# EAGLE board untitled (EAGLE 9.6.2)
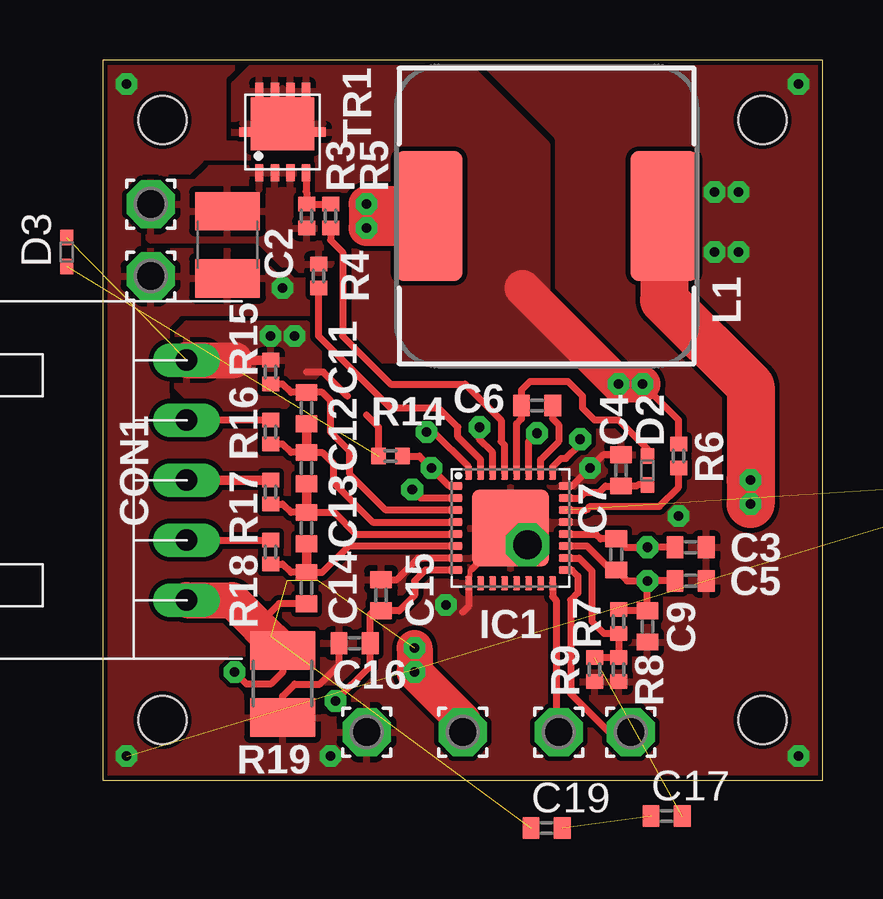
[diagram p0: board, top side]
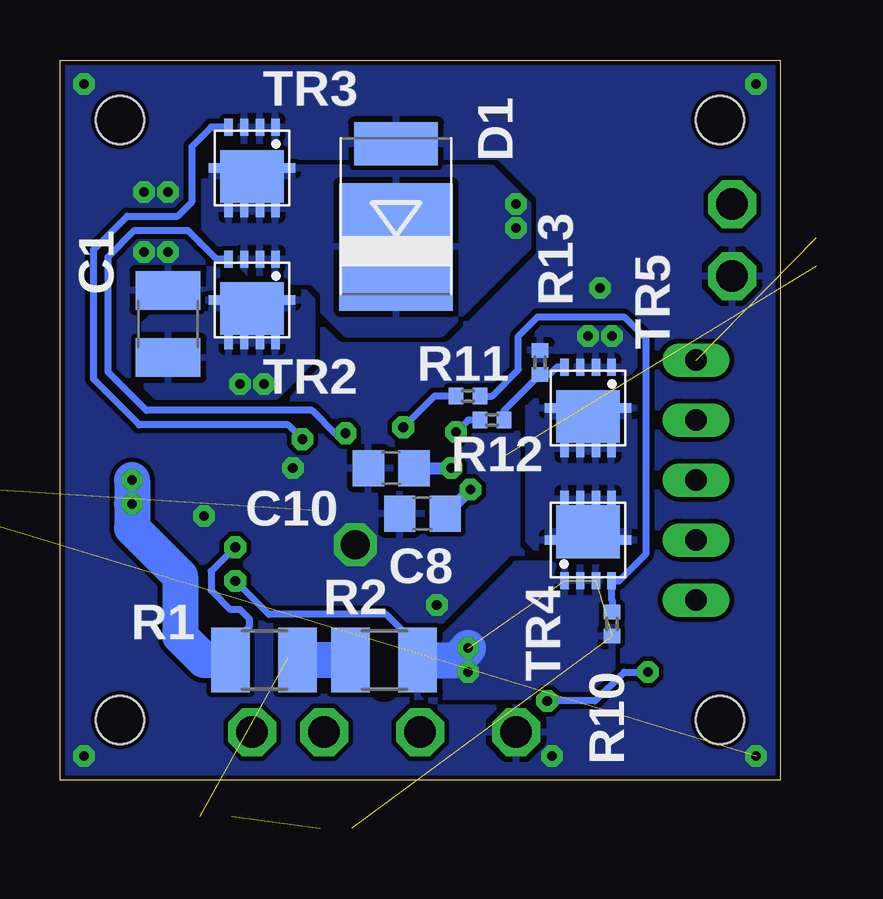
[diagram p1: board, bottom side, seen from below]

Size 30 x 30 mm. Coordinates in mm from the lower left corner, seen from the top.
Outline: 0,0 30,0 30,30 0,30 0,0
Copper layers (1*16): Top 0.035mm / dielectric 1.5mm / Bottom 0.035mm
Design rules "SeeedStudio_2layer_DRU_no_angle_20140221_IMD555": minimum track width 0.2mm, minimum drill 0.3mm, track to track 0.2mm, track to pad 0.2mm, pad to pad 0.2mm, via to via 0.2mm, smd to smd 0mil, copper to edge 0.2mm, drill to drill 10mil, minimum pad ring 0.25mm, minimum via ring 0.2mm, stop-mask expansion 0.03mm, vias tented up to drill 5mm, thermal gap 10mil
Holes 2 mm at 2.5,2.5 27.5,2.5 2.5,27.5 27.5,27.5
tRestrict: 1 lines
bRestrict: 1 lines

## Footprints (pad centres in the part's own frame; a part is rotated, then mirrored left to right if it is on the bottom)
C1210 = smd 1.6 x 2.7: 1 -1.4,0; 2 1.4,0
C0402 = smd 0.7 x 0.9: 1 -0.65,0; 2 0.65,0
C0805 = smd 1.3 x 1.5: 1 -0.95,0; 2 0.95,0
XH-5_S = drill 0.9 long: 1 5,0; 2 2.5,0; 3 0,0; 4 -2.5,0; 5 -5,0
TO-277A = smd 1.78 x 3.48: A 3.01,0 | smd 5.3 x 4.72: C -1.29,0
VMN2 = smd 0.65 x 0.55: A 0.6,0; C -0.6,0
QFN32 = smd 0.6 x 0.3: 1 -2.3,1.75; 2 -2.3,1.25; 3 -2.3,0.75; 4 -2.3,0.25; 5 -2.3,-0.25; 6 -2.3,-0.75; 7 -2.3,-1.25; 8 -2.3,-1.75; 17 2.3,-1.75; 18 2.3,-1.25; 19 2.3,-0.75; 20 2.3,-0.25; 21 2.3,0.25; 22 2.3,0.75; 23 2.3,1.25; 24 2.3,1.75 | smd 0.3 x 0.6: 9 -1.75,-2.3; 10 -1.25,-2.3; 11 -0.75,-2.3; 12 -0.25,-2.3; 13 0.25,-2.3; 14 0.75,-2.3; 15 1.25,-2.3; 16 1.75,-2.3; 25 1.75,2.3; 26 1.25,2.3; 27 0.75,2.3; 28 0.25,2.3; 29 -0.25,2.3; 30 -0.75,2.3; 31 -1.25,2.3; 32 -1.75,2.3 | smd 3.2 x 3.2: EXP 0,0
SCRH125 = smd 5.4 x 2.8: 1 0,4.9; 2 0,-4.9
2.0/1.3 = drill 1.3 pad 2 octagon: 1 0,0
R1210 = smd 1.6 x 2.7: 1 -1.4,0; 2 1.4,0
R0402 = smd 0.6 x 0.7: 1 -0.5,0; 2 0.5,0
TSON_ADVANCE = smd 0.35 x 0.7: 1 -0.975,-1.7; 2 -0.325,-1.7; 3 0.325,-1.7; 4 0.975,-1.7; 5 0.975,1.7; 6 0.325,1.7; 7 -0.325,1.7; 8 -0.975,1.7 | smd 2.65 x 2.2: DRAIN1 0,0.35 | smd 3.6 x 0.4: DRAIN2 0,0

## Placement (x,y rotation side)
C1  22u  [C1210]  25.5,19 90 bottom
C2  22u  [C1210]  5.2,22.3 270 top
C3  0.1u  [C0402]  24.5,9.7 0 top
C4  4.7u  [C0402]  21.6,12.9 90 top
C5  0.1u  [C0402]  24.5,8.3 0 top
C6  0.1u  [C0402]  18.1,15.6 180 top
C7  0.1u  [C0402]  21.4,9.4 270 top
C8  4.7u  [C0805]  14.9,11.1 180 bottom
C9  xxxxxx  [C0402]  22.7,6.4 270 top
C10  4.7u  [C0805]  16.2,13 180 bottom
C11  0.1u  [C0402]  8.5,15.5 270 top
C12  0.1u  [C0402]  8.5,13 270 top
C13  0.1u  [C0402]  8.5,10.5 270 top
C14  0.1u  [C0402]  8.5,8 270 top
C15  47p  [C0402]  11.6,7.7 90 top
C16  0.1u  [C0402]  10.5,5.7 180 top
C17  47p  [C0402]  23.5,-1.5 0 top
C18  1u  [C0402]  33.5,11.5 270 top  (outside the outline)
C19  47p  [C0402]  18.5,-2 0 top
CON1  5P_(ICSP)XH_S  [XH-5_S]  3.5,12.5 90 top
D1  [TO-277A]  16,23.5 90 bottom
D2  [VMN2]  22.7,12.9 270 top
D3  [VMN2]  -1.5,22 90 top
IC1  BQ40Z60  [QFN32]  17,10.5 0 top
L1  22u  [SCRH125]  18.5,23.5 90 top
PAD1  WIREPAD2.0/1.2  [2.0/1.3]  2,24 0 top
PAD2  WIREPAD2.0/1.2  [2.0/1.3]  2,21 0 top
PAD3  WIREPAD2.0/1.2  [2.0/1.3]  19,2 0 top
PAD4  WIREPAD2.0/1.2  [2.0/1.3]  22,2 0 top
PAD5  WIREPAD2.0/1.2  [2.0/1.3]  15,2 0 top
PAD6  WIREPAD2.0/1.2  [2.0/1.3]  11,2 0 top
R1  5m  [R1210]  21.5,5 0 bottom
R2  5m  [R1210]  16.5,5 0 bottom
R3  4.7M  [R0402]  8.5,23.5 270 top
R4  10k  [R0402]  9,21 90 top
R5  10k  [R0402]  9.5,23.5 90 top
R6  10  [R0402]  24,13.5 90 top
R7  100k  [R0402]  21.5,6.6 90 top
R8  10k  [R0402]  21.5,4.6 90 top
R9  33k  [R0402]  20.5,4.6 90 top
R10  4.7M  [R0402]  7,6.5 270 bottom
R11  10k  [R0402]  13,16 0 bottom
R12  10k  [R0402]  12,15 0 bottom
R13  4.7M  [R0402]  10,17.4 90 bottom
R14  10  [R0402]  12,13.5 180 top
R15  100  [R0402]  7,17 90 top
R16  100  [R0402]  7,14.5 90 top
R17  100  [R0402]  7,12 90 top
R18  100  [R0402]  7,9.5 90 top
R19  5m  [R1210]  7.5,4 90 top
TR1  MOSFET_NTSON  [TSON_ADVANCE]  7.5,27 0 top
TR2  MOSFET_NTSON  [TSON_ADVANCE]  22,20 180 bottom
TR3  MOSFET_NTSON  [TSON_ADVANCE]  22,25.5 180 bottom
TR4  MOSFET_NTSON  [TSON_ADVANCE]  8,10 0 bottom
TR5  MOSFET_NTSON  [TSON_ADVANCE]  8,15.5 180 bottom

## Library data of the parts
C1-C19 = rcl; SPICEPREFIX: C
CON1 = 4 CONNECTOR
D1 IC1 TR1-TR5 = 0 my parts
D2 D3 = 5 D
L1 = 2 RCL
PAD1-PAD6 = 4 PAD
R1-R19 = rcl; SPICEPREFIX: R

## Nets
GND: C1.2 C2.2 C3.2 C4.2 C5.2 C8.2 C9.2 C10.2 C15.2 C16.2 C18.2 D1.A IC1.7 IC1.9 IC1.21 IC1.24 IC1.EXP PAD2.1 PAD6.1 R8.1 R9.1 R19.1 TR3.1 TR3.2 TR3.3
N$1: CON1.4 R18.2
N$2: R1.2 R2.1
N$3: D3.C R14.2
N$4: CON1.3 R17.2
N$5: C17.1 C19.2
N$7: CON1.2 R16.2
N$10: CON1.1 D3.A R13.2 R15.2 TR5.1 TR5.2 TR5.3
N$11: TR4.5 TR4.6 TR4.7 TR4.8 TR4.DRAIN1 TR4.DRAIN2 TR5.5 TR5.6 TR5.7 TR5.8 TR5.DRAIN1 TR5.DRAIN2
N$13: C14.2 C15.1 C16.1 CON1.5 IC1.8 R19.2
N$17: C10.1 IC1.1 R14.1
N$18: IC1.30 R11.1
N$20: IC1.32 R12.1
N$21: R12.2 R13.1 TR5.4
N$23: R10.1 R11.2 TR4.4
N$28: C8.1 IC1.2
N$29: C11.2 C12.1 IC1.4 R16.1
N$30: C17.2 IC1.18 R7.1 R8.2 R9.2
N$43: C12.2 C13.1 IC1.5 R17.1
N$44: IC1.29 R5.1
N$45: R3.1 R5.2 TR1.4
N$46: C6.1 IC1.26
N$47: C6.2 D2.C IC1.28
N$48: C4.1 D2.A IC1.23
N$49: D1.C L1.1 TR2.1 TR2.2 TR2.3 TR3.5 TR3.6 TR3.7 TR3.8 TR3.DRAIN1 TR3.DRAIN2
N$50: C1.1 R6.2 TR1.5 TR1.6 TR1.7 TR1.8 TR1.DRAIN1 TR1.DRAIN2 TR2.5 TR2.6 TR2.7 TR2.8 TR2.DRAIN1 TR2.DRAIN2
N$51: IC1.27 TR2.4
N$52: IC1.25 TR3.4
N$63: C3.1 C7.1 IC1.20 L1.2 R1.1
N$65: IC1.31 R4.1
N$66: C2.1 PAD1.1 R3.2 R4.2 TR1.1 TR1.2 TR1.3
N$67: C18.1 IC1.22 R6.1
N$68: C13.2 C14.1 IC1.6 R18.1
N$69: C11.1 IC1.3 R15.1
N$70: IC1.17 PAD4.1
N$71: IC1.16 PAD3.1
V+: C5.1 C7.2 C9.1 C19.1 IC1.19 PAD5.1 R2.2 R7.2 R10.2 TR4.1 TR4.2 TR4.3

## Tracks (layer width: path | path; a pad name or v marks a point on that pad's centre or on a via)
GND  (via drill 0.4 pad 0.9, 1.2)  (1 unrouted)
  Top 0.2: IC1.EXP 17,10.3 | 15.4,8.8 15.3,8.7 15.3,8.5 15.25,8.45 IC1.9
  Top 0.3: IC1.7 13.15,9.25 12.25,8.35 C15.2 | IC1.24 19.55,12.25 v20.3,13 20.85,13.55 C4.2 | R19.1 7.5,3.5 8,4 9.05,4 9.85,4.8 C16.2 | IC1.9 15.25,7.25 15,7 | 17,10.3 16.9,10.3 15.4,8.8
  other vias: 24,11 14.3,7.3 17.7,9.8 26.5,22 25.5,22 25.5,24.5 26.5,24.5 7.5,20.5 1,1 9.5,1 1,29 29,1 29,29
  pour Top (rank 6): 0,30 30,30 30,0 0,0
  pour Bottom (rank 6): 0,30 30,30 30,0 0,0
N$1
  Top 0.3: CON1.4 R18.2
N$2
  Bottom 1.5: R2.1 R1.2
N$3  (1 unrouted)
  Top 0.3: R14.2 11.5,14.7 11,15.2
N$4
  Top 0.4: CON1.3 R17.2
N$5  (1 unrouted)
N$7
  Top 0.3: R16.2 CON1.2
N$10  (via drill 0.4 pad 0.9)  (1 unrouted)
  Top 0.3: 10.2,16 9.2,17 8.5,17
  Top 0.4: 5,17.5 5.5,17.5 R15.2
  Top 1.5: CON1.1 5.5,17.5
  other vias: 8,18.5 7,18.5
  pour Bottom: 6.7,19.2 9.9,19.2 10.6,18.5 10.6,17.6 10,17 6.3,17 5.9,17.4 5.9,18.4
  pour Top: 3.5,19 3,18.5 3,16.5 4,15.5 7.5,15.5 9,17 9,18.5 8.5,19
N$11
  pour Bottom: 6.5,16 10,16 10.5,15.5 10.5,10 10,9.5 6,9.5 5.5,10 5.5,15
N$13  (via drill 0.4 pad 0.9)
  Top 0.3: IC1.8 13.45,8.75 13,8.3 13,7.7 12.35,7.05 C15.1 11.45,7.2 11.15,6.9 C16.1 11.15,4.75 v9.7,3.3 | R19.2 7.5,4.5 7,4 6,4 v5.5,4.5 | C14.2 7.35,7.35 6.45,6.45
  Top 1.5: R19.2 6.45,6.45 5.4,7.5 CON1.5
  Bottom 0.3: v5.5,4.5 6.5,4.5 7.7,3.3 v9.7,3.3
N$17  (via drill 0.4 pad 0.9)
  Top 0.3: IC1.1 14.45,12.25 v13.7,13 13.2,13.5 R14.1
  Bottom 0.5: C10.1 v13.7,13
N$18  (via drill 0.4 pad 0.9)
  Top 0.3: IC1.30 16.25,13.65 15.7,14.2 v15.7,14.7
  Bottom 0.3: R11.1 14.4,16 v15.7,14.7
N$20  (via drill 0.4 pad 0.9)
  Top 0.3: IC1.32 15.25,13.05 13.8,14.5 v13.5,14.5
  Bottom 0.3: R12.1 13,15 v13.5,14.5
N$21
  Bottom 0.3: R12.2 11.5,15.4 R13.1 9.6,16.9 9.3,17.2 TR5.4
N$23
  Bottom 0.3: R11.2 12,16 10.9,17.1 10.9,18.5 10.1,19.3 6.5,19.3 5.6,18.4 5.6,9.4 6.7,8.3 TR4.4 7.03,7.53 7,7.5 R10.1
N$28  (via drill 0.4 pad 0.9)
  Top 0.3: IC1.2 13.25,11.75 v12.9,12.1
  Bottom 0.5: C8.1 13.9,11.1 v12.9,12.1
N$29
  Top 0.3: R16.1 7.5,14 7.85,13.65 C12.1 9.15,13.65 9.6,13.2 9.6,12.4 11.25,10.75 IC1.4
  Top 0.4: C11.2 C12.1
N$30  (1 unrouted)
  Top 0.3: IC1.18 19.85,9.25 20.4,8.7 20.4,6.6 20.9,6.1 R7.1 R8.2 R9.2
N$43
  Top 0.3: R17.1 7.5,11.5 7.85,11.15 C13.1 9.65,11.15 10.55,10.25 IC1.5
  Top 0.4: C13.1 C12.2
N$44
  Top 0.3: IC1.29 16.75,13.95 16.6,14.1 16.6,15 15.1,16.5 12,16.5 10,18.5 10,22 9.5,22.5 R5.1
N$45
  Top 0.3: R5.2 R3.1 8.5,24.5 8.47,24.52 TR1.4
N$46
  Top 0.3: IC1.26 18.25,13.35 19,14.1 19,14.81 18.75,15.06 C6.1
N$47
  Top 0.3: IC1.28 17.25,14.85 17.45,15.05 C6.2 17.45,16.25 17.8,16.6 19.4,16.6 20,16 20,15.5 20.5,15 21.5,15 22.7,13.8 D2.C
N$48
  Top 0.3: IC1.23 19.85,11.75 20.1,12 20.7,12 20.95,12.25 C4.1 22.25,12.25 22.3,12.3 D2.A
N$49  (via drill 0.4 pad 0.9)
  Top 1.5: L1.1 13.1,24 v11,24 v11,23 13.1,23
  pour Bottom (rank 2): 12,25.5 23.5,25.5 24,25 24,23 22,21 20.5,21 18.1,18.6 14.1,18.6 10.5,22.2 10.5,24
N$50  (via drill 0.4 pad 0.9)
  Top 0.3: R6.2 24,15 v22.5,16.5
  Top 1.5: 17.5,20.5 v21.5,16.5 v22.5,16.5
  pour Bottom: 19.5,20 20,20.5 25,20.5 26.5,19 26.5,16.5 26,16 21,16 19.5,17.5
  pour Top (rank 5): 6.5,30 15,30 18.5,26.5 18.5,20 21,17.5 11.5,17.5 10.5,18.5 10.5,23 8.5,25 7,25 5.5,26.5 5.5,29
N$51  (via drill 0.4 pad 0.9)
  Top 0.3: IC1.27 17.75,14.1 v18.1,14.45
  Bottom 0.3: v18.1,14.45 18.55,14.45 19.5,15.4 26.4,15.4 28,17 28,21.8 26.9,22.9 24.68,22.9 24.14,22.36 23.48,21.7 TR2.4
N$52  (via drill 0.4 pad 0.9)
  Top 0.3: IC1.25 18.75,13.05 19.1,13.4 19.3,13.4 19.9,14 v19.9,14.2
  Bottom 0.3: v19.9,14.2 20.5,14.8 26.7,14.8 28.6,16.7 28.6,22.1 27.2,23.5 25.1,23.5 24.5,24.1 24.5,26.4 23.7,27.2 TR3.4
N$63  (via drill 0.4 pad 0.9)
  Top 0.3: IC1.20 20.55,10.25 20.75,10.05 C7.1 21.75,9.7 v22.7,9.7 C3.1
  Top 2: L1.2 23.4,20 27,16.4 v27,12.5 v27,11.5
  Bottom 0.3: v22.7,9.7 23.7,8.7 23.7,7.9 22.9,7.1 22.5,7.1 22.1,6.7 22.1,6.4 22.9,5.6 R1.1
  Bottom 1.5: R1.1 24,5 25,6 25,8.5 27,10.5 v27,11.5 v27,12.5
N$65
  Top 0.3: IC1.31 15.75,13.35 14.8,14.3 14.8,14.7 14,15.5 12,15.5 9,18.5 R4.1
N$66
  pour Top (rank 2): 1.9,24.9 3.9,24.9 4.5,25.5 8.5,25.5 9.5,24.5 9.5,21.5 9,21 8.5,21 8,21.5 7.5,21.5 6.5,22.5 2,22.5 1.5,23 1.5,24.5
N$67  (1 unrouted)
  Top 0.3: IC1.22 20.15,11.25 20.3,11.4 23.2,11.4 24,12.2 R6.1
N$68
  Top 0.3: R18.1 7.5,9 7.85,8.65 C14.1 9.15,8.65 10.25,9.75 IC1.6
  Top 0.4: C14.1 C13.2
N$69
  Top 0.3: R15.1 7.5,16.5 7.85,16.15 C11.1 9.15,16.15 9.5,15.8 9.5,14.5 10.3,13.7 10.3,12.75 11.8,11.25 IC1.3
N$70
  Top 0.3: IC1.17 19.55,8.75 19.8,8.5 19.8,7.8 19.5,7.5 19.5,3.6 21.1,2 PAD4.1
N$71
  Top 0.3: IC1.16 18.75,7.65 18.9,7.5 18.9,2.1 PAD3.1
V+  (via drill 0.4 pad 0.9)  (5 unrouted)
  Top 0.3: IC1.19 20.19,9.75 21.19,8.75 C7.2 21.85,8.3 v22.7,8.3 | R7.2 21.7,7.1 21.75,7.05 C9.1 v22.7,8.3 | C5.1 v22.7,8.3
  Top 1.5: PAD5.1 15,2.5 v13,4.5 v13,5.5
  Bottom 0.3: v22.7,8.3 21.3,6.9 16.4,6.9 15.1,5.6 R2.2
  Bottom 1.5: R2.2 13.5,5 v13,5.5
  pour Bottom: 7.5,9 11,9 14.5,5.5 15.5,5.5 16,5 16,4 15.5,3.5 8,3.5 7,4.5 7,8.5